# Altium PCB ICwT.PcbDoc (part 3 of 4)
Units mm, origin at the board's own origin, x right, y up, seen from the top; angles counter-clockwise.
Board outline 132 x 99.5 mm, 2 copper layers (Top Layer, Bottom Layer); 241 components, 265 nets, 1108 pads, 443 vias.
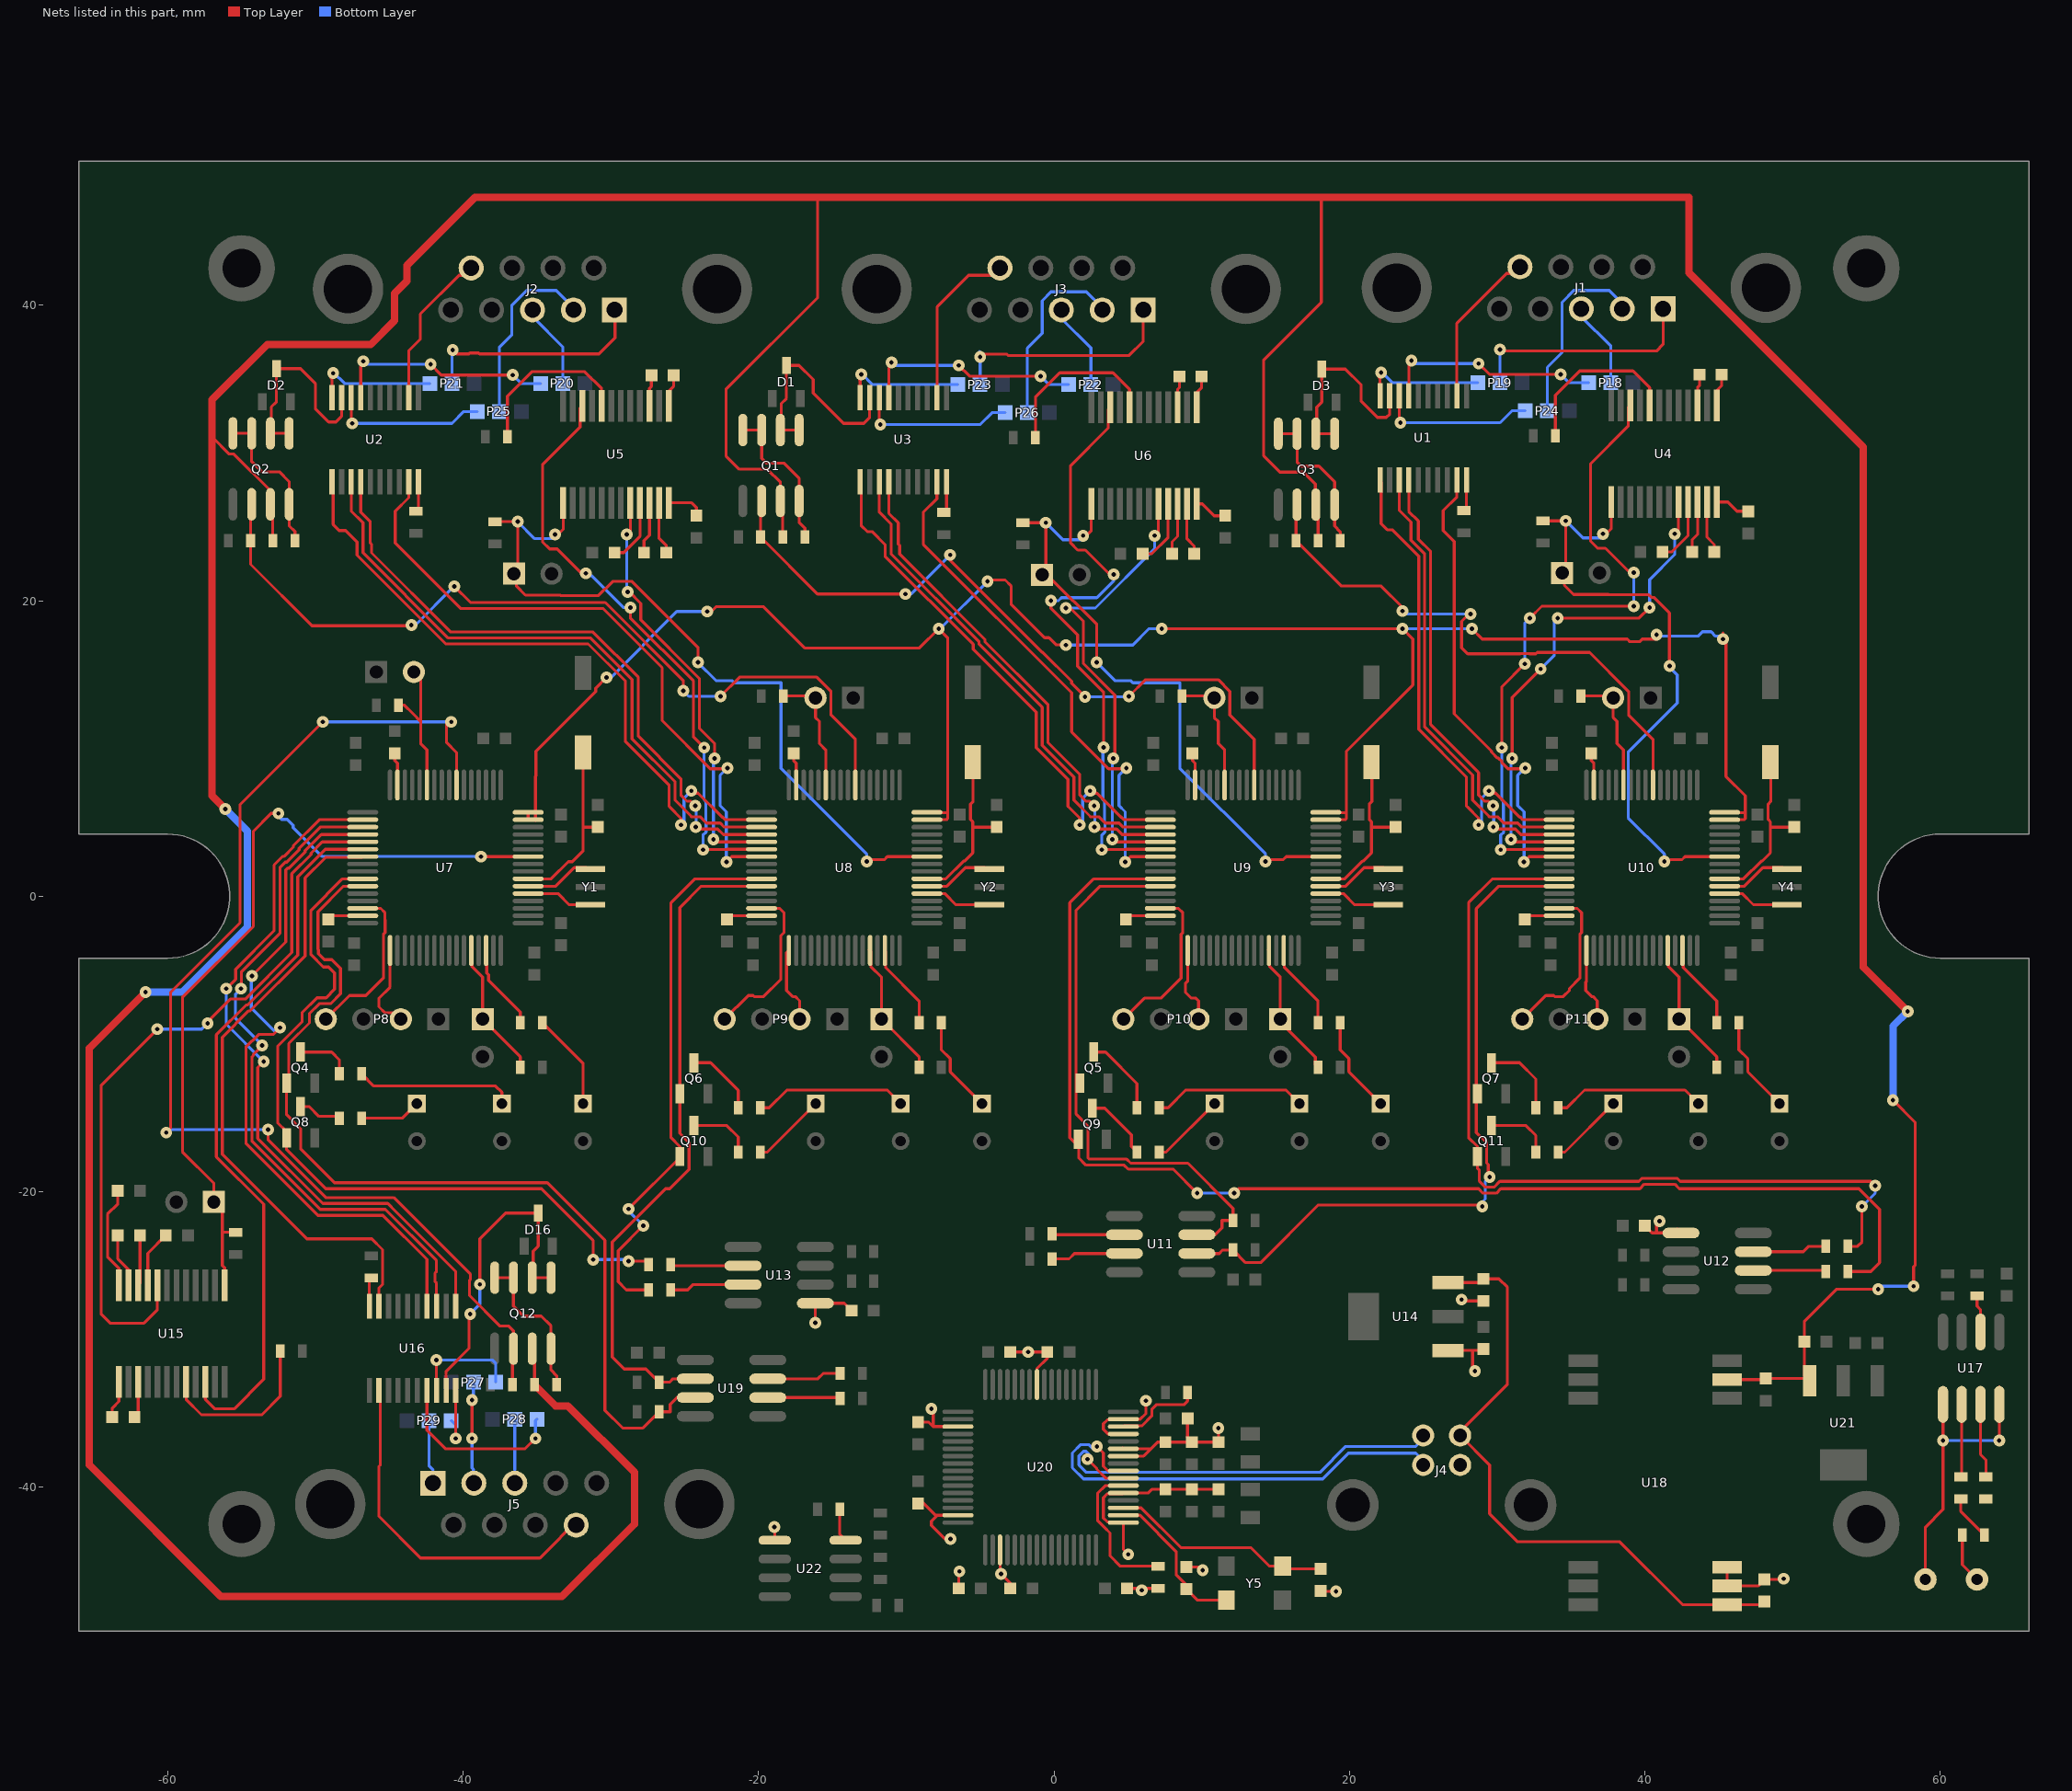
[diagram p3: the nets of this part, all layers, seen from the top]

## Via types
v1: diameter 0.8, hole 0.3, Top Layer to Bottom Layer, 433 vias
v2: diameter 1, hole 0.5, Top Layer to Bottom Layer, 10 vias

## Nets (pads, with @x,y where several pads share a name; then routed paths per layer and width w, separated by ;. In a path a pad name is that pad's centre, name@x,y a point inside that pad or via, vN(x,y) a via of type N, cw(c..) or ccw(c..) an arc to the next point about the centre after c; other vN are vias at no path point) (continued)
MISO_EX_External_iface1: P27.3 U16.18 | length 7.4
  Top Layer w0.2: U16.18@-41.8,-33.45 v1(-41.8,-31.4)
  Bottom Layer w0.2: v1(-41.8,-31.4) -38,-31.4 -37.8,-31.6 P27.3@-37.8,-32.9
MISO_EX_External_iface2: P25.3 U2.18 | length 10.6
  Top Layer w0.2: U2.18@-47.575,33.75 -47.575,32.075 v1(-47.5,32)
  Bottom Layer w0.2: v1(-47.5,32) -40.75,32 -39.95,32.8 P25.3@-39.05,32.8
MISO_EX_External_iface3: P26.3 U3.18 | length 10.6
  Top Layer w0.2: U3.18@-11.825,33.675 -11.825,32 v1(-11.75,31.925)
  Bottom Layer w0.2: v1(-11.75,31.925) -5,31.925 -4.2,32.725 P26.3@-3.3,32.725
MISO_EX_External_iface4: P24.3 U1.18 | length 10.6
  Top Layer w0.2: U1.18@23.379,33.8 23.379,32.125 v1(23.454,32.05)
  Bottom Layer w0.2: v1(23.454,32.05) 30.204,32.05 31.004,32.85 P24.3@31.904,32.85
MISO_External_iface1: U7.35 U16.3 | length 46.7
  Top Layer w0.2: v1(-55.038,-6.262) -55,-6.224 -55,-5.11 -52.4,-2.51 -52.4,1.939 -52.039,2.3 -51.944,2.3 -51.096,3.148 -51.096,3.242 -49.664,4.675 -49.125,4.675 U7.35@-46.795,4.675 ; v1@-53.6,-10.086 -53.6,-10.194 -53.706,-10.3 -53.79,-10.3 -54.2,-10.71 -54.2,-10.794 -54.3,-10.894 -54.3,-16.566 -49.666,-21.2 -45.266,-21.2 -41.8,-24.666 -41.8,-25.41 -41.9,-25.51 -41.9,-26.09 -41.8,-26.19 U16.3@-41.8,-27.75
  Bottom Layer w0.2: v1(-55.038,-6.262) -55.407,-6.631 -55.407,-8.278 -53.6,-10.086 v1(-53.6,-10.1)
MISO_External_iface2: U2.3 U8.35 | length 42.9
  Top Layer w0.2: U2.3@-47.575,28.05 -47.575,26.069 -46.778,25.272 -46.778,23.25 -41.003,17.475 -31.369,17.475 -28.556,14.662 -28.556,10.65 -25.651,7.745 -25.651,6.511 -24.541,5.401 -24.541,5.375 -23.961,5.375 -23.536,4.95 -22.594,4.95 -22.319,4.675 U8.35@-19.795,4.675
MISO_External_iface3: U3.3 U9.35 | length 33.6
  Top Layer w0.2: U3.3@-11.825,27.975 -11.825,25.994 -11.028,25.197 -11.028,23.175 -5.069,17.216 -5.069,17.051 -0.8,12.782 -0.8,10.216 1.349,8.067 1.349,6.511 2.459,5.401 2.459,5.375 3.039,5.375 3.464,4.95 4.406,4.95 4.681,4.675 U9.35@7.205,4.675
MISO_External_iface4: U1.3 U10.35 | length 30.3
  Top Layer w0.2: U1.3@23.379,28.1 23.379,26.119 24.176,25.322 24.176,24.091 25.1,23.167 25.1,11.456 28.325,8.231 28.325,8.207 28.349,8.183 28.349,6.511 29.459,5.401 29.459,5.375 30.039,5.375 30.464,4.95 31.406,4.95 31.681,4.675 U10.35@34.205,4.675
MOSI_EX_External_iface1: P28.3 U16.17 | length 12.2
  Top Layer w0.2: U16.17@-42.45,-33.45 -42.45,-36.15 -41.2,-37.4 -35.8,-37.4 v1(-35.1,-36.7)
  Bottom Layer w0.2: v1(-35.1,-36.7) -35.1,-35.5 P28.3@-35,-35.4
MOSI_EX_External_iface2: P20.3 U2.17 | length 15.1
  Top Layer w0.2: U2.17@-46.925,33.75 -46.925,35.825 -46.75,36 v1(-46.75,36.2) ; v1(-42.2,36) -41.475,35.275 v1(-36.65,35.275)
  Bottom Layer w0.2: v1@-46.75,36 v1(-42.2,36) ; v1(-36.65,35.275) -36.075,34.7 P20.3@-34.75,34.7
MOSI_EX_External_iface3: P22.3 U3.17 | length 15.1
  Top Layer w0.2: U3.17@-11.175,33.675 -11.175,35.75 -11,35.925 v1(-11,36.125) ; v1(-6.45,35.925) -5.725,35.2 v1(-0.9,35.2)
  Bottom Layer w0.2: v1@-11,35.925 v1(-6.45,35.925) ; v1(-0.9,35.2) -0.325,34.625 P22.3@1,34.625
MOSI_EX_External_iface4: P18.3 U1.17 | length 15.1
  Top Layer w0.2: U1.17@24.029,33.8 24.029,35.875 24.204,36.05 v1(24.204,36.25) ; v1(28.754,36.05) 29.479,35.325 v1(34.304,35.325)
  Bottom Layer w0.2: v1@24.204,36.05 v1(28.754,36.05) ; v1(34.304,35.325) 34.879,34.75 P18.3@36.204,34.75
MOSI_External_iface1: U7.36 U16.4 | length 46.9
  Top Layer w0.2: v1(-54.3,-5.4) -52,-3.1 -52,1.773 -51.873,1.9 -51.779,1.9 -50.696,2.983 -50.696,3.077 -49.598,4.175 U7.36@-46.795,4.175 ; v1(-52.4,-8.9) -52.862,-9.362 -53.852,-9.362 -54.7,-10.21 -54.7,-16.731 -49.831,-21.6 -45.431,-21.6 -42.45,-24.581 U16.4@-42.45,-27.75
  Bottom Layer w0.2: v1@-54.338,-5.705 -54.338,-7.572 -52.81,-9.1 -52.6,-9.1 v1(-52.4,-8.9)
MOSI_External_iface2: U2.4 U8.36 | length 43.3
  Top Layer w0.2: U2.4@-46.925,28.05 -46.925,25.984 -46.283,25.342 -46.283,23.9 -46.2,23.817 -46.2,23.237 -40.838,17.875 -31.203,17.875 -28.134,14.805 -28.134,10.825 -25.251,7.942 -25.251,6.835 -24.841,6.425 -24.575,6.425 v1(-24.275,6.125) ; v1(-24.251,4.675) -24.225,4.649 -24.225,4.55 -22.76,4.55 -22.385,4.175 U8.36@-19.795,4.175
  Bottom Layer w0.2: v1(-24.275,6.125) -24.226,6.076 -24.226,4.7 v1(-24.251,4.675)
MOSI_External_iface3: U3.4 U9.36 | length 34
  Top Layer w0.2: U3.4@-11.175,27.975 -11.175,25.909 -10.533,25.267 -10.533,23.825 -10.45,23.742 -10.45,23.162 -4.669,17.381 -4.669,17.216 -0.4,12.947 -0.4,10.381 1.749,8.233 1.749,6.835 2.159,6.425 2.425,6.425 v1(2.725,6.125) ; v1(2.749,4.675) 2.775,4.649 2.775,4.55 4.24,4.55 4.615,4.175 U9.36@7.205,4.175
  Bottom Layer w0.2: v1(2.725,6.125) 2.774,6.076 2.774,4.7 v1(2.749,4.675)
MOSI_External_iface4: U1.4 U10.36 | length 30.7
  Top Layer w0.2: U1.4@24.029,28.1 24.029,26.034 24.671,25.392 24.671,24.161 25.5,23.332 25.5,11.622 28.725,8.397 28.725,8.372 28.749,8.349 28.749,6.835 29.159,6.425 29.425,6.425 v1(29.725,6.125) ; v1(29.749,4.675) 29.775,4.649 29.775,4.55 31.24,4.55 31.615,4.175 U10.36@34.205,4.175
  Bottom Layer w0.2: v1(29.725,6.125) 29.774,6.076 29.774,4.7 v1(29.749,4.675)
NetC2_1: C75.1 U20.3 Y5.4 | length 15.1
  Top Layer w0.2: U20.3@4.7,-41.4 5.9,-41.4 8.6,-44.1 13.35,-44.1 14.6,-45.35 Y5.4@15.475,-45.35 15.65,-45.525 C75.1@18.05,-45.525
NetC4_1: C74.1 U20.2 Y5.2 | length 10.4
  Top Layer w0.2: U20.2@4.7,-41.9 5.825,-41.9 8.275,-44.35 8.275,-45.924 8.975,-46.624 C74.1@8.975,-46.9 9.725,-47.65 Y5.2@11.675,-47.65
NetC16_1: C64.1 U15.1 | length 2.6
  Top Layer w0.2: C64.1@-63.75,-35.25 -63.75,-34.65 -63.3,-34.2 U15.1@-63.3,-32.875
NetC16_2: C64.2 U15.3 | length 2.5
  Top Layer w0.2: C64.2@-62.25,-35.25 -62,-35 U15.3@-62,-32.875
NetC28_1: C51.1 U15.23 | length 3.7
  Top Layer w0.2: C51.1@-63.375,-22.95 -63.375,-24.551 -62.65,-25.276 U15.23@-62.65,-26.325
NetC28_2: C51.2 U15.22 | length 3.4
  Top Layer w0.2: U15.22@-62,-26.325 -61.875,-26.2 C51.2@-61.875,-22.95
NetC29_1: C52.1 U15.21 | length 3.9
  Top Layer w0.2: U15.21@-61.35,-26.325 -61.35,-24.175 C52.1@-60.125,-22.95
NetC31_1: C49.1 U15.24 | length 7
  Top Layer w0.2: C49.1@-63.375,-19.95 -63.375,-20.825 -64.075,-21.525 -64.075,-24.416 -63.3,-25.191 U15.24@-63.3,-26.325
NetC44_2: C33.2 U7.47 | length 2.5
  Top Layer w0.2: C33.2@-49.125,-1.575 -48.875,-1.325 U7.47@-46.795,-1.325 U7.47@-46.845,-1.275
NetC45_2: C34.2 U8.47 | length 2.5
  Top Layer w0.2: C34.2@-22.125,-1.575 -21.875,-1.325 U8.47@-19.795,-1.325 U8.47@-19.845,-1.275
NetC46_2: C35.2 U9.47 | length 2.5
  Top Layer w0.2: C35.2@4.875,-1.575 5.125,-1.325 U9.47@7.205,-1.325 U9.47@7.155,-1.275
NetC47_2: C36.2 U10.47 | length 2.8
  Top Layer w0.2: U10.47@34.205,-1.325 C36.2@32.125,-1.325 ; C36.2@32.125,-1.325 C36.2@31.875,-1.575 C36.2@32.125,-1.325
NetC60_2: C13.2 U7.31 | length 2.2
  Top Layer w0.2: C13.2@-44.625,9.675 -44.625,9.175 -44.445,8.995 U7.31@-44.445,7.525
NetC61_2: C14.2 U8.31 | length 2.2
  Top Layer w0.2: C14.2@-17.625,9.675 -17.625,9.175 -17.445,8.995 U8.31@-17.445,7.525
NetC62_2: C15.2 U9.31 | length 2.2
  Top Layer w0.2: C15.2@9.375,9.675 9.375,9.175 9.555,8.995 U9.31@9.555,7.525
NetC63_2: C16.2 U10.31 | length 2.2
  Top Layer w0.2: C16.2@36.375,9.675 36.375,9.175 36.555,8.995 U10.31@36.555,7.525
NetC68_1: C11.1 U6.23 | length 3.6
  Top Layer w0.2: U6.23@9.025,26.55 9,26.525 9,24.175 9.5,23.675 C11.1@9.5,23.175
NetC68_2: C11.2 U6.22 | length 3.5
  Top Layer w0.2: C11.2@8,23.175 8,23.984 8.375,24.359 U6.22@8.375,26.55
NetC69_1: C12.1 U6.21 | length 4.5
  Top Layer w0.2: C12.1@6,23.175 6.625,23.175 7.725,24.275 U6.21@7.725,26.55
NetC70_1: C9.1 U5.23 | length 3.6
  Top Layer w0.2: U5.23@-26.725,26.625 -26.75,26.6 -26.75,24.25 -26.25,23.75 C9.1@-26.25,23.25
NetC70_2: C9.2 U5.22 | length 3.5
  Top Layer w0.2: C9.2@-27.75,23.25 -27.75,24.059 -27.375,24.434 U5.22@-27.375,26.625
NetC71_1: C10.1 U5.21 | length 4.5
  Top Layer w0.2: C10.1@-29.75,23.25 -29.125,23.25 -28.025,24.35 U5.21@-28.025,26.625
NetC72_1: C7.1 U4.23 | length 3.6
  Top Layer w0.2: U4.23@44.229,26.675 44.204,26.65 44.204,24.3 44.704,23.8 C7.1@44.704,23.3
NetC72_2: C7.2 U4.22 | length 3.5
  Top Layer w0.2: C7.2@43.204,23.3 43.204,24.109 43.579,24.484 U4.22@43.579,26.675
NetC73_1: C8.1 U4.21 | length 4.5
  Top Layer w0.2: C8.1@41.204,23.3 41.829,23.3 42.929,24.4 U4.21@42.929,26.675
NetC74_1: C6.1 U6.24 | length 2.2
  Top Layer w0.2: U6.24@9.675,26.55 10.05,26.55 10.85,25.75 C6.1@11.5,25.75
NetC75_1: C5.1 U5.24 | length 2.6
  Top Layer w0.2: U5.24@-26.075,26.625 -24.525,26.625 -24.2,26.3 C5.1@-24.2,25.75
NetC76_1: C4.1 U4.24 | length 2.4
  Top Layer w0.2: U4.24@44.879,26.675 45.625,26.675 46.25,26.05 C4.1@47,26.05
NetC77_1: C3.1 U6.1 | length 2.2
  Top Layer w0.2: U6.1@9.7,33.074 U6.1@9.675,33.1 9.675,34.1 10,34.425 C3.1@10,35.175
NetC77_2: C3.2 U6.3 | length 2.1
  Top Layer w0.2: U6.3@8.375,33.1 8.375,34.3 8.5,34.425 C3.2@8.5,35.175
NetC78_1: C2.1 U5.1 | length 2.2
  Top Layer w0.2: U5.1@-26.05,33.149 -26.075,33.174 -26.075,34.175 -25.75,34.5 C2.1@-25.75,35.25
NetC78_2: C2.2 U5.3 | length 2.1
  Top Layer w0.2: U5.3@-27.375,33.175 -27.375,34.375 -27.25,34.5 C2.2@-27.25,35.25
NetC79_1: C1.1 U4.1 | length 2.2
  Top Layer w0.2: U4.1@44.879,33.225 U4.1@44.904,33.199 ; U4.1@44.879,33.225 44.879,34.225 45.204,34.55 C1.1@45.204,35.3
NetC79_2: C1.2 U4.3 | length 2.1
  Top Layer w0.2: U4.3@43.579,33.225 43.579,34.425 43.704,34.55 C1.2@43.704,35.3
NetD1_3: D16.3 Q12.5 Q12.6 U16.19 | length 21.7
  Top Layer w0.2: U16.19@-41.15,-33.45 -41.15,-32.15 -39.6,-30.6 -39.6,-28.35 v1(-39.525,-28.275) ; v1(-38.864,-26.275) -38.864,-23.189 -37.125,-21.45 D16.3@-34.91,-21.45 -34.91,-23.685 -35.26,-24.035 -35.26,-25.765 Q12.6@-35.32,-25.825 Q12.5@-34.05,-25.825
  Bottom Layer w0.2: v1(-39.525,-28.275) -38.864,-27.614 v1(-38.864,-26.275)
NetD2_1: D4.1 R32.1 | length 4.2
  Top Layer w0.2: R32.1@-46.875,-15.025 -44.115,-15.025 D4.1@-43.125,-14.035
NetD3_1: D5.1 R28.1 | length 10.8
  Top Layer w0.2: R28.1@-46.875,-12.025 -46.05,-12.85 -37.8,-12.85 -37.375,-13.275 D5.1@-37.375,-14.035
NetD4_1: D6.1 R20.2 | length 6.6
  Top Layer w0.2: R20.2@-34.625,-8.575 -31.875,-11.325 D6.1@-31.875,-14.035
NetD5_1: D10.1 R33.1 | length 5.1
  Top Layer w0.2: R33.1@-19.875,-17.325 -19.415,-17.325 D10.1@-16.125,-14.035
NetD6_1: D7.1 R29.1 | length 10.4
  Top Layer w0.2: R29.1@-19.875,-14.325 -19.275,-14.325 -18.075,-13.125 -11.285,-13.125 D7.1@-10.375,-14.035
NetD7_1: D8.1 R21.2 | length 6.6
  Top Layer w0.2: R21.2@-7.625,-8.575 -7.625,-10.401 -7.025,-11.001 -7.025,-11.885 D8.1@-4.875,-14.035
NetD8_1: D11.1 R34.1 | length 5.1
  Top Layer w0.2: R34.1@7.125,-17.325 7.585,-17.325 D11.1@10.875,-14.035
NetD9_1: D9.1 R30.1 | length 10.4
  Top Layer w0.2: R30.1@7.125,-14.325 7.725,-14.325 8.925,-13.125 15.715,-13.125 D9.1@16.625,-14.035
NetD10_1: D12.1 R22.2 | length 6.6
  Top Layer w0.2: R22.2@19.375,-8.575 19.375,-10.401 19.975,-11.001 19.975,-11.885 D12.1@22.125,-14.035
NetD11_1: D15.1 R35.1 | length 5.1
  Top Layer w0.2: R35.1@34.125,-17.325 34.585,-17.325 D15.1@37.875,-14.035
NetD12_1: D13.1 R31.1 | length 10.4
  Top Layer w0.2: R31.1@34.125,-14.325 34.725,-14.325 35.925,-13.125 42.715,-13.125 D13.1@43.625,-14.035
NetD13_1: D14.1 R23.2 | length 6.6
  Top Layer w0.2: R23.2@46.375,-8.575 46.375,-10.401 46.975,-11.001 46.975,-11.885 D14.1@49.125,-14.035
NetD14_3: D3.3 Q3.5 Q3.6 U1.19 | length 13.7
  Top Layer w0.2: Q3.5@19,31.3 Q3.6@17.73,31.3 17.79,31.36 17.79,33.09 18.14,33.44 D3.3@18.14,35.675 19.725,35.675 20.8,34.6 20.8,33.5 21.9,32.4 22.5,32.4 22.729,32.629 U1.19@22.729,33.875
NetD15_3: D2.3 Q2.5 Q2.6 U2.19 | length 14.1
  Top Layer w0.2: Q2.5@-51.775,31.325 Q2.6@-53.045,31.325 -52.985,31.385 -52.985,33.115 -52.635,33.465 D2.3@-52.635,35.7 -51,35.7 -50,34.7 -50,33 -49.1,32.1 -48.6,32.1 -48.225,32.475 U2.19@-48.225,33.75
NetD16_3: D1.3 Q1.5 Q1.6 U3.19 | length 15.1
  Top Layer w0.2: Q1.5@-17.25,31.55 Q1.6@-18.52,31.55 -18.46,31.61 -18.46,33.34 -18.11,33.69 D1.3@-18.11,35.925 -17.25,35.925 -16.3,34.975 -16.3,34.05 -14.25,32 -12.875,32 -12.475,32.4 U3.19@-12.475,33.75
NetJ1_1: J5.1 P29.2 | length 3.4
  Bottom Layer w0.2: P29.2@-42.3,-35.5 -42.3,-38.57 -42.04,-38.83
NetJ1_2: J5.2 P27.2 | length 6.4
  Top Layer w0.2: v1(-39.4,-36.7) v1(-39.4,-34.1)
  Bottom Layer w0.2: v1(-39.4,-36.7) -39.4,-38.7 -39.3,-38.8 J5.2@-39.3,-39.2 ; v1(-39.4,-34.1) -39.3,-34 P27.2@-39.3,-32.9
NetJ1_3: J5.3 P28.2 | length 3.4
  Bottom Layer w0.2: -36.5,-38.83 P28.2@-36.5,-35.4
NetJ3_1: J2.1 P21.2 | length 15.3
  Top Layer w0.2: v1(-40.7,36.958) -40.442,36.7 -39.61,36.7 -39.54,36.77 -38.96,36.77 -38.89,36.7 -30.8,36.7 -29.71,37.79 J2.1@-29.71,39.18
  Bottom Layer w0.2: P21.2@-40.75,34.7 -40.75,36.908 v1(-40.7,36.958)
NetJ3_2: J2.2 P25.2 | length 13.3
  Bottom Layer w0.2: P25.2@-37.55,32.8 -37.55,37.15 -36.7,38 -36.7,40 -35.7,41 -33.7,41 -32.48,39.78 J2.2@-32.48,39.18
NetJ3_3: J2.3 P20.2 | length 5.3
  Bottom Layer w0.2: J2.3@-35.25,39.18 -33.25,37.18 P20.2@-33.25,34.7
NetJ4_1: J3.1 P23.2 | length 15.5
  Top Layer w0.2: v1(-5,36.5) -4.805,36.695 -3.21,36.695 -3.115,36.6 5.1,36.6 6.04,37.54 J3.1@6.04,39.18
  Bottom Layer w0.2: v1@-5.04,36.873 -5,36.833 v1(-5,36.5) P23.2@-5,34.625
NetJ4_2: J3.2 P26.2 | length 13.4
  Bottom Layer w0.2: P26.2@-1.8,32.725 -1.8,37.1 -0.8,38.1 -0.8,40.3 -0.2,40.9 2.2,40.9 3.27,39.83 J3.2@3.27,39.18
NetJ4_3: J3.3 P22.2 | length 5.3
  Bottom Layer w0.2: J3.3@0.5,39.105 2.5,37.105 P22.2@2.5,34.625
NetJ5_1: J1.1 P19.2 | length 15.5
  Top Layer w0.2: v1(30.204,36.996) 30.3,36.9 40.8,36.9 41.244,37.344 J1.1@41.244,39.305
  Bottom Layer w0.2: P19.2@30.204,34.75 v1(30.204,36.996)
NetJ5_2: J1.2 P24.2 | length 13.4
  Bottom Layer w0.2: P24.2@33.404,32.85 33.404,35.79 34.4,36.786 34.4,40.2 35.2,41 37.6,41 38.474,40.126 J1.2@38.474,39.305
NetJ5_3: J1.3 P18.2 | length 5.3
  Bottom Layer w0.2: J1.3@35.704,39.23 37.704,37.23 P18.2@37.704,34.75
NetP1_1: P17.1 U17.1 U17.4 | length 19.8
  Top Layer w0.2: P17.1@59,-46.25 59,-42.7 60.195,-41.505 v1(60.195,-36.85) 60.195,-34.405 U17.1@60.19,-34.4 ; v1(63.995,-36.85) 64,-36.845 U17.4@64,-33.196
  Bottom Layer w0.2: v1(60.195,-36.85) v1(63.995,-36.85)
NetP1_2: P17.2 R64.1 | length 3.4
  Top Layer w0.2: R64.1@61.5,-43.25 61.5,-45.25 P17.2@62.5,-46.25
NetP3_1: P12.1 R24.2 U7.60 | length 9.3
  Top Layer w0.2: U7.60@-39.445,-3.675 -39.395,-3.725 -39.395,-4.761 -38.675,-5.481 P12.1@-38.675,-8.325 -36.125,-10.875 R24.2@-36.125,-11.575
NetP4_1: P13.1 R25.2 U8.60 | length 9.3
  Top Layer w0.2: U8.60@-12.495,-3.625 U8.60@-12.445,-3.675 -12.395,-3.725 -12.395,-4.761 -11.675,-5.481 P13.1@-11.675,-8.325 -9.125,-10.875 R25.2@-9.125,-11.575
NetP5_1: P14.1 R26.2 U9.60 | length 9.3
  Top Layer w0.2: U9.60@14.505,-3.625 U9.60@14.555,-3.675 14.605,-3.725 14.605,-4.761 15.325,-5.481 P14.1@15.325,-8.325 15.325,-8.525 17.7,-10.9 17.7,-11.4 R26.2@17.875,-11.575
NetP6_1: P15.1 R27.2 U10.60 | length 9.3
  Top Layer w0.2: U10.60@41.505,-3.625 U10.60@41.555,-3.675 41.605,-3.725 41.605,-4.761 42.325,-5.481 P15.1@42.325,-8.325 44.875,-10.875 R27.2@44.875,-11.575
NetP11_2: P5.2 R16.2 U8.27 | length 8.4
  Top Layer w0.2: R16.2@-18.325,13.55 -16.265,13.55 P5.2@-16.14,13.425 -16.14,12.09 -15.875,11.825 -15.875,10.325 -15.445,9.895 U8.27@-15.445,7.525
NetP12_2: P6.2 R17.2 U9.27 | length 8.4
  Top Layer w0.2: R17.2@8.675,13.55 10.735,13.55 P6.2@10.86,13.425 10.86,12.09 11.125,11.825 11.125,10.325 11.555,9.895 U9.27@11.555,7.525
NetP13_2: P7.2 R18.2 U10.27 | length 8.4
  Top Layer w0.2: R18.2@35.675,13.55 37.735,13.55 P7.2@37.86,13.425 37.86,12.09 38.125,11.825 38.125,10.325 38.555,9.895 U10.27@38.555,7.525
NetP14_2: P4.2 R19.2 U7.27 | length 10
  Top Layer w0.2: R19.2@-44.375,12.925 -43.975,12.925 -43.425,12.375 -42.875,11.825 ; P4.2@-43.335,15.175 -42.875,14.715 -42.875,11.825 ; U7.27@-42.445,7.525 -42.445,9.895 -42.875,10.325 -42.875,11.825
NetQ1_2: Q12.2 R56.2 U7.23 | length 80
  Top Layer w0.2: v1(-60.1,-16) -59.8,-15.7 -59.8,-6.5 -55.1,-1.8 -55.1,6.2 v1(-49.5,11.8) ; v1(-53.2,-15.8) -53.2,-16.5 -49.3,-20.4 -44.7,-20.4 -39.5,-25.6 -39.5,-25.921 -39.564,-25.985 -39.564,-27.036 -37.5,-29.1 -36.9,-29.1 -36.59,-29.41 Q12.2@-36.59,-30.625 -36.66,-30.695 R56.2@-36.66,-33.075 ; v1(-40.802,11.798) -41.121,11.798 -41.121,10.402 -40.445,9.726 U7.23@-40.445,7.525
  Bottom Layer w0.2: v1(-60.1,-16) -59.9,-15.8 v1(-53.2,-15.8) ; v1(-49.5,11.8) -49.498,11.798 v1(-40.802,11.798)
NetQ1_4: Q12.4 Q12.7 Q12.8 R55.1 | length 10.4
  Top Layer w0.2: Q12.8@-37.86,-25.825 Q12.7@-36.59,-25.825 -36.59,-27.745 -35.91,-28.425 -34.71,-28.425 -34.05,-29.085 Q12.4@-34.05,-30.625 -34.05,-32.075 -33.66,-32.465 R55.1@-33.66,-33.075
NetQ5_STM321_3: Q4.3 R28.2 | length 3.8
  Top Layer w0.2: Q4.3@-51,-10.55 -48.9,-10.55 -48.375,-11.075 R28.2@-48.375,-12.025
NetQ5_STM322_3: Q6.3 R29.2 | length 5
  Top Layer w0.2: Q6.3@-24.375,-11.275 -23.25,-11.275 -21.375,-13.15 R29.2@-21.375,-14.325
NetQ5_STM323_3: Q5.3 R30.2 | length 5.4
  Top Layer w0.2: Q5.3@2.7,-10.55 3.49,-10.55 5.625,-12.685 R30.2@5.625,-14.325
NetQ5_STM324_3: Q7.3 R31.2 | length 5.4
  Top Layer w0.2: Q7.3@29.625,-11.275 31.525,-11.275 32.625,-12.375 R31.2@32.625,-14.325
NetQ9_STM321_3: Q8.3 R32.2 | length 2.9
  Top Layer w0.2: Q8.3@-51,-14.25 -50.4,-14.25 -49.75,-14.9 -48.5,-14.9 R32.2@-48.375,-15.025
NetQ9_STM322_3: Q10.3 R33.2 | length 4.3
  Top Layer w0.2: Q10.3@-24.375,-15.525 -22.15,-15.525 -21.375,-16.3 R33.2@-21.375,-17.325
NetQ9_STM323_3: Q9.3 R34.2 | length 4.7
  Top Layer w0.2: Q9.3@2.6,-14.35 3.44,-14.35 5.25,-16.16 5.25,-16.95 R34.2@5.625,-17.325
NetQ9_STM324_3: Q11.3 R35.2 | length 4.4
  Top Layer w0.2: Q11.3@29.625,-15.525 31.95,-15.525 32.625,-16.2 R35.2@32.625,-17.325
NetQ10_2: Q3.2 R15.2 U10.23 | length 38.9
  Top Layer w0.2: Q3.2@16.46,26.5 16.39,26.43 R15.2@16.39,24.05 19.44,21 22.131,21 23.6,19.531 v1(23.6,19.3) ; v1(28.2,19.1) 28.2,19.2 27.6,18.6 27.6,16.81 28.01,16.4 31.56,16.4 31.585,16.425 32.165,16.425 32.19,16.4 32.625,16.4 32.725,16.5 36.27,16.5 38.91,13.86 38.91,12.27 40.555,10.625 U10.23@40.555,7.525
  Bottom Layer w0.2: v1(23.6,19.3) 23.8,19.1 v1(28.2,19.1)
NetQ10_4: Q3.4 Q3.7 Q3.8 R14.1 | length 10.4
  Top Layer w0.2: Q3.8@15.19,31.3 Q3.7@16.46,31.3 16.46,29.38 16.74,29.1 17.94,29.1 19,28.04 Q3.4@19,26.5 19,25.05 19.39,24.66 R14.1@19.39,24.05
NetQ11_2: Q2.2 R13.2 U8.23 | length 57.7
  Top Layer w0.2: Q2.2@-54.315,26.525 -54.385,26.455 R13.2@-54.385,24.075 -54.385,22.46 -50.225,18.3 -43.55,18.3 v1(-43.5,18.35) ; v1(-40.6,20.975) -39.5,19.875 -30.375,19.875 -25.1,14.6 v1(-25.1,13.9) ; v1(-22.575,13.525) -21.275,14.825 -16.055,14.825 -15.09,13.86 -15.09,12.27 -13.445,10.625 U8.23@-13.445,7.525
  Bottom Layer w0.2: v1(-43.5,18.35) -43.225,18.35 v1(-40.6,20.975) ; v1(-25.1,13.9) -24.725,13.525 v1(-22.575,13.525)
NetQ11_4: Q2.4 Q2.7 Q2.8 R12.1 | length 10.4
  Top Layer w0.2: Q2.8@-55.585,31.325 Q2.7@-54.315,31.325 -54.315,29.405 -53.635,28.725 -52.435,28.725 -51.775,28.065 Q2.4@-51.775,26.525 -51.775,25.075 -51.385,24.685 R12.1@-51.385,24.075
NetQ12_2: Q1.2 R11.2 U9.23 | length 49
  Top Layer w0.2: Q1.2@-19.79,26.75 -19.86,26.68 R11.2@-19.86,24.3 -16.01,20.45 v1(-10.05,20.45) ; v1(-7.025,23.1) -7.025,22.735 -0.795,16.505 -0.755,16.505 1.2,14.55 1.2,14.4 v1(2.1,13.5) ; v1(5.075,13.525) 6.2,14.65 11.12,14.65 11.91,13.86 11.91,12.27 13.555,10.625 U9.23@13.555,7.525
  Bottom Layer w0.2: v1(-10.05,20.45) -9.675,20.45 v1(-7.025,23.1) ; v1(2.1,13.5) 5.05,13.5 v1(5.075,13.525)
NetQ12_4: Q1.4 Q1.7 Q1.8 R10.1 | length 10.4
  Top Layer w0.2: Q1.8@-21.06,31.55 Q1.7@-19.79,31.55 -19.79,29.63 -19.46,29.3 -18.26,29.3 -17.25,28.29 Q1.4@-17.25,26.75 -17.25,25.3 -16.86,24.91 R10.1@-16.86,24.3
NetR2_2: R66.2 U20.6 | length 10.1
  Top Layer w0.2: U20.6@4.7,-39.9 3.475,-39.9 2.95,-40.425 2.95,-42.252 3.448,-42.75 3.45,-42.75 3.8,-43.1 3.8,-44.65 4.5,-45.35 R66.2@7.05,-45.35
NetR4_2: R60.1 R64.2 | length 3.1
  Top Layer w0.2: R60.1@61.395,-40.8 61.395,-41.645 R64.2@63,-43.25
NetR6_1: R62.1 U22.4 | length 2.3
  Top Layer w0.2: R62.1@-14.5,-41.5 -14.5,-43.195 U22.4@-14.1,-43.595
NetR7_1: R61.1
NetR7_2: R61.2 U17.3 | length 5.1
  Top Layer w0.2: U17.3@62.73,-34.4 62.73,-37.785 63.095,-38.15 R61.2@63.095,-39.3
NetR8_2: R60.2 U17.2 | length 4.9
  Top Layer w0.2: R60.2@61.395,-39.3 61.46,-39.235 U17.2@61.46,-34.4
NetR10_2: R58.2 U19.2 | length 4.9
  Top Layer w0.2: U19.2@-19.375,-33.935 -14.54,-33.935 R58.2@-14.475,-34
NetR11_1: R57.1 U20.14 | length 5.9
  Top Layer w0.2: U20.14@4.7,-35.9 4.75,-35.85 5.966,-35.85 6.625,-35.191 6.625,-34.74 6.925,-34.44 6.925,-34.425 8.8,-34.425 9.05,-34.175 R57.1@9.05,-33.6
NetR15_2: R53.2 U19.3 | length 5.1
  Top Layer w0.2: U19.3@-19.375,-32.665 -15.99,-32.665 -15.625,-32.3 R53.2@-14.475,-32.3
NetR16_2: R52.2 U15.8 | length 11.6
  Top Layer w0.2: U15.8@-58.75,-32.875 -58.75,-34.068 -57.718,-35.1 -53.625,-35.1 -52.375,-33.85 R52.2@-52.375,-30.8
NetR17_1: R48.1 U17.6 | length 2.5
  Top Layer w0.2: R48.1@62.495,-27.05 62.495,-27.75 62.73,-27.985 U17.6@62.73,-29.5
NetR19_2: R51.2 U13.3 | length 5.1
  Top Layer w0.2: R51.2@-25.95,-26.65 -24.8,-26.65 -24.435,-26.285 U13.3@-21.05,-26.285
NetR22_1: R43.1 U16.10 | length 2
  Top Layer w0.2: U16.10@-46.35,-27.75 -46.35,-26 R43.1@-46.2,-25.85
NetR23_2: R46.2 U12.2 | length 4.9
  Top Layer w0.2: U12.2@47.35,-25.335 52.185,-25.335 R46.2@52.25,-25.4
NetR24_2: R45.2 U13.2 | length 4.9
  Top Layer w0.2: R45.2@-25.95,-24.95 -25.885,-25.015 U13.2@-21.05,-25.015
NetR25_2: R44.2 U11.3 | length 5.1
  Top Layer w0.2: R44.2@-0.125,-24.55 1.025,-24.55 1.39,-24.185 U11.3@4.775,-24.185
NetR30_2: R39.2 U12.3 | length 5.1
  Top Layer w0.2: U12.3@47.35,-24.065 50.735,-24.065 51.1,-23.7 R39.2@52.25,-23.7
NetR31_2: R37.2 U11.2 | length 4.9
  Top Layer w0.2: R37.2@-0.125,-22.85 -0.06,-22.915 U11.2@4.775,-22.915
NetR45_1: R20.1 U7.62 | length 5.9
  Top Layer w0.2: U7.62@-38.445,-3.675 -38.395,-3.725 -38.395,-5.196 -38.275,-5.316 -38.275,-5.7 -36.125,-7.85 R20.1@-36.125,-8.575
NetR46_1: R21.1 U8.62 | length 5.9
  Top Layer w0.2: U8.62@-11.445,-3.675 -11.395,-3.725 -11.395,-4.827 -9.125,-7.097 R21.1@-9.125,-8.575
NetR47_1: R22.1 U9.62 | length 5.9
  Top Layer w0.2: U9.62@15.555,-3.675 15.605,-3.725 15.605,-4.827 17.875,-7.097 R22.1@17.875,-8.575
NetR48_1: R23.1 U10.62 | length 5.9
  Top Layer w0.2: U10.62@42.555,-3.675 42.605,-3.725 42.605,-4.827 44.875,-7.097 R23.1@44.875,-8.575
NetR62_1: R6.1 U3.10 | length 2.1
  Top Layer w0.2: R6.1@-7.45,25.975 -7.275,26.15 U3.10@-7.275,27.975
NetR63_1: R5.1 U2.10 | length 2.1
  Top Layer w0.2: R5.1@-43.2,26.05 -43.025,26.225 U2.10@-43.025,28.05
NetR64_1: R4.1 U1.10 | length 2.1
  Top Layer w0.2: R4.1@27.754,26.1 27.929,26.275 U1.10@27.929,28.1
NetR65_2: R3.2 U6.8 | length 11.5
  Top Layer w0.2: R3.2@-1.25,31.025 -1.25,33.775 0.4,35.425 3.993,35.425 5.125,34.293 U6.8@5.125,33.1
NetR66_2: R2.2 U5.8 | length 11.5
  Top Layer w0.2: R2.2@-37,31.1 -37,33.85 -35.35,35.5 -31.757,35.5 -30.625,34.368 U5.8@-30.625,33.175
NetR67_2: R1.2 U4.8 | length 11.5
  Top Layer w0.2: R1.2@33.954,31.15 33.954,33.9 35.604,35.55 39.197,35.55 40.329,34.418 U4.8@40.329,33.225
NetU7_9: U7.39 U16.9 | length 43
  Top Layer w0.2: U7.39@-46.795,2.675 -46.845,2.625 -49.309,2.625 -50.7,1.234 -50.7,-4.046 -54.417,-7.762 -54.515,-7.762 -56.3,-9.547 -56.3,-17.476 -50.576,-23.2 -46.176,-23.2 -45.45,-23.926 -45.45,-26.274 -45.7,-26.524 U16.9@-45.7,-27.75
NetU13_5: U7.5 Y1.1 | length 4.5
  Top Layer w0.2: U7.5@-35.595,0.175 -33.575,0.175 -32.825,-0.575 Y1.1@-31.375,-0.575
NetU13_6: U7.6 Y1.3 | length 4.4
  Top Layer w0.2: U7.6@-35.595,0.675 -33.725,0.675 -32.475,1.925 Y1.3@-31.675,1.925
NetU14_5: U8.5 Y2.1 | length 4.5
  Top Layer w0.2: U8.5@-8.595,0.175 -7.4,0.175 -6.65,-0.575 Y2.1@-4.375,-0.575
NetU14_6: U8.6 Y2.3 | length 4.4
  Top Layer w0.2: U8.6@-8.595,0.675 -7.25,0.675 -6,1.925 Y2.3@-4.675,1.925
NetU14_39: U2.9 U8.39 | length 44.7
  Top Layer w0.2: U2.9@-43.675,28.05 -43.675,26.975 -44.6,26.05 -44.6,23.9 -40.175,19.475 -30.541,19.475 -26.525,15.459 -26.525,11.885 -23.265,8.625 -22.15,8.625 v1(-22.1,8.675) ; v1(-22.175,2.325) -21.825,2.675 U8.39@-19.795,2.675
  Bottom Layer w0.2: v1(-22.175,2.325) -22.175,5.709 -22.601,6.135 -22.601,6.715 -22.6,6.716 -22.6,8.175 v1(-22.1,8.675)
NetU15_5: U9.5 Y3.1 | length 4.5
  Top Layer w0.2: U9.5@18.405,0.175 19.6,0.175 20.35,-0.575 Y3.1@22.625,-0.575
NetU15_6: U9.6 Y3.3 | length 4.4
  Top Layer w0.2: U9.6@18.405,0.675 19.75,0.675 21,1.925 Y3.3@22.325,1.925
NetU15_39: U3.9 U9.39 | length 35.4
  Top Layer w0.2: U3.9@-7.925,27.975 -7.925,26.9 -8.85,25.975 -8.85,23.825 1.2,13.775 1.2,11.125 3.7,8.625 4.85,8.625 v1(4.9,8.675) ; v1(4.825,2.325) 5.175,2.675 U9.39@7.205,2.675
  Bottom Layer w0.2: v1(4.825,2.325) 4.825,5.709 4.399,6.135 4.399,6.715 4.4,6.716 4.4,8.175 v1(4.9,8.675)
NetU16_5: U10.5 Y4.1 | length 4.5
  Top Layer w0.2: U10.5@45.405,0.175 46.6,0.175 47.35,-0.575 Y4.1@49.625,-0.575
NetU16_6: U10.6 Y4.3 | length 4.4
  Top Layer w0.2: U10.6@45.405,0.675 46.75,0.675 48,1.925 Y4.3@49.325,1.925
NetU16_39: U1.9 U10.39 | length 32.2
  Top Layer w0.2: U1.9@27.279,28.1 27.279,27.025 26.354,26.1 26.354,24.741 27.1,23.995 27.1,12.344 29.624,9.82 29.624,9.761 30.034,9.35 30.094,9.35 30.325,9.119 30.325,9.035 30.735,8.625 31.85,8.625 v1(31.9,8.675) ; v1(31.825,2.325) 32.175,2.675 U10.39@34.205,2.675
  Bottom Layer w0.2: v1(31.825,2.325) 31.825,5.709 31.399,6.135 31.399,6.715 31.4,6.716 31.4,8.175 v1(31.9,8.675)
"RS485; /RS232_External_iface1": P16.1 R38.2 U7.10 U15.13 | length 56.1
  Top Layer w0.2: U15.13@-56.15,-26.325 -56.15,-25.15 -56.3,-25 -56.3,-22.7 ; R38.2@-55.4,-22.75 -56.25,-22.75 -56.3,-22.7 ; v1(-52.5,5.6) -53,5.6 -54.2,4.4 -54.2,-2.047 -59,-6.847 -59,-17.3 -56.875,-19.425 P16.1@-56.875,-20.7 -56.3,-20.7 -56.3,-22.7 ; v1(-38.789,2.675) U7.10@-35.595,2.675
  Bottom Layer w0.2: v1(-52.5,5.6) -52.5,5.4 -52.3,5.2 -51.91,5.2 -51.5,4.79 -51.5,4.634 -49.566,2.7 -39.2,2.7 -38.975,2.475 -38.675,2.475 -38.789,2.589 v1(-38.789,2.675)
"RS485; /RS232_External_iface2": P2.1 R8.2 U5.13 U8.10 | length 53
  Top Layer w0.2: R8.2@-37.85,25.35 v1(-36.3,25.35) -36.3,21.85 P2.1@-36.075,21.625 ; P2.1@-36.4,21.625 -36.4,21 -35.775,20.375 -33.409,20.375 -33.384,20.35 -30.825,20.35 -29.875,21.3 -28.56,21.3 -24.101,16.841 v1(-24.101,15.826) ; v1(-33.775,24.475) -33.852,24.398 -33.852,24.202 -33.85,24.2 -33.225,24.825 U5.13@-33.225,26.625 ; v1(-12.675,2.35) -12.4,2.35 -12.275,2.475 -11.475,2.475 -11.275,2.675 U8.10@-8.595,2.675
  Bottom Layer w0.2: v1(-36.3,25.35) -35.15,24.2 -33.85,24.2 -33.852,24.202 -33.852,24.398 v1(-33.775,24.475) ; v1(-24.101,15.826) -22.85,14.575 -21.775,14.575 -21.65,14.45 -18.475,14.45 -18.475,8.654 -12.675,2.854 v1(-12.675,2.35)
"RS485; /RS232_External_iface3": P3.1 R9.2 U6.13 U9.10 | length 43.9
  Top Layer w0.2: R9.2@-2.1,25.275 v1(-0.55,25.275) -0.55,21.775 P3.1@-0.325,21.55 ; P3.1@-0.65,21.55 -0.26,21.55 2.899,18.391 v1(2.899,15.826) ; v1(1.975,24.4) 1.898,24.323 1.898,24.127 1.9,24.125 2.525,24.75 U6.13@2.525,26.55 ; v1(14.325,2.35) 14.6,2.35 14.725,2.475 15.525,2.475 15.725,2.675 U9.10@18.405,2.675
  Bottom Layer w0.2: v1(-0.55,25.275) 0.6,24.125 1.9,24.125 1.898,24.127 1.898,24.323 v1(1.975,24.4) ; v1(2.899,15.826) 4.15,14.575 5.225,14.575 5.35,14.45 8.525,14.45 8.525,8.654 14.325,2.854 v1(14.325,2.35)
"RS485; /RS232_External_iface4": P1.1 R7.2 U4.13 U10.10 | length 43.8
  Top Layer w0.2: R7.2@33.104,25.4 v1(34.654,25.4) 34.654,21.9 P1.1@34.879,21.675 ; P1.1@34.554,21.675 34.554,21.05 35.179,20.425 37.545,20.425 37.57,20.4 40.275,20.4 40.45,20.225 40.615,20.225 41.675,19.165 v1(41.675,15.575) ; v1(37.179,24.525) 37.102,24.448 37.102,24.252 37.104,24.25 37.729,24.875 U4.13@37.729,26.675 ; v1(41.325,2.35) 41.6,2.35 41.725,2.475 42.525,2.475 42.725,2.675 U10.10@45.405,2.675
  Bottom Layer w0.2: v1(34.654,25.4) 35.804,24.25 37.104,24.25 37.102,24.252 37.102,24.448 v1(37.179,24.525) ; v1(41.325,2.35) 41.325,2.854 38.875,5.304 38.875,9.747 42.2,13.072 42.2,14.984 41.675,15.509 v1(41.675,15.575)
RST_GEN_STM321: U7.15 U7.16 U8.15 U8.16 U9.15 U9.16 U10.15 U10.16 | length 149.9
  Top Layer w0.2: U7.15@-35.595,5.175 U7.16@-35.595,5.675 U7.16@-35.1,5.675 ; U7.15@-35.1,5.125 U7.16@-35.1,5.675 ; v1(-30.3,14.8) -31.025,14.075 -31.025,13.851 -35.075,9.801 -35.075,8.135 -35.1,8.11 U7.16@-35.1,5.675 ; v1(-23.466,19.266) -23.424,19.224 -23.224,19.224 -22.849,19.6 -19.678,19.6 -16.878,16.8 -9.1,16.8 v1(-7.8,18.1) -7.2,17.5 -7.2,5.65 ; U8.15@-8.595,5.175 -7.275,5.175 -7.2,5.25 -7.2,5.65 ; U8.16@-7.775,5.725 -7.825,5.675 U8.16@-8.595,5.675 -8.57,5.65 -7.2,5.65 ; v1(-4.5,21.3) -4.4,21.4 -3.3,21.4 -2.9,21 -2.9,19.769 -0.631,17.5 -0.334,17.5 0.162,17.004 0.7,17.004 0.704,17 v1(0.8,17) ; v1(7.3,18.1) v1(23.6,18.1) 24.3,17.4 24.3,14.3 19.8,9.8 19.8,5.65 ; U9.15@18.405,5.175 19.725,5.175 19.8,5.25 19.8,5.65 ; U9.16@19.225,5.725 19.175,5.675 U9.16@18.405,5.675 18.43,5.65 19.8,5.65 ; v1(28.3,18.1) 29,17.4 38.819,17.4 38.994,17.225 39.656,17.225 39.831,17.4 v1@40.8,17.4 ; v1(45.3,17.4) 45.3,17.8 ; U10.15@45.405,5.175 46.725,5.175 46.8,5.25 46.8,5.65 ; v1@45.5,17.5 45.5,8.1 46.8,6.8 46.8,5.65 ; U10.16@46.225,5.725 46.175,5.675 U10.16@45.405,5.675 45.43,5.65 46.8,5.65
  Bottom Layer w0.2: v1(-30.3,14.8) -30.2,14.7 -30.1,14.7 -25.534,19.266 v1(-23.466,19.266) ; v1(-7.8,18.1) -7.7,18.1 v1(-4.5,21.3) ; v1@0.7,17.004 0.704,17 v1(0.8,17) 5.334,17 6.434,18.1 v1(7.3,18.1) ; v1(23.6,18.1) v1(28.3,18.1) ; v1@40.634,17.8 40.834,17.6 43.61,17.6 43.91,17.9 44.49,17.9 44.79,17.6 45.1,17.6 v1(45.3,17.4)
  other v1: 40.8,17.7
RST_STM321: C25.2 S1.2 U7.7 | length 12.2
  Top Layer w0.2: U7.7@-35.595,1.175 -34.035,1.175 -32.872,2.338 -32.606,2.338 -31.875,3.069 -31.875,4.675 ; S1.2@-31.875,9.725 -31.875,4.675 ; C25.2@-30.875,4.675 -31.875,4.675
RST_STM322: C26.2 S3.2 U8.7 | length 12.3
  Top Layer w0.2: U8.7@-8.595,1.175 -7.316,1.175 -6.116,2.375 -6.06,2.375 -5.5,2.935 -5.5,5.035 -5.65,5.185 -5.65,6.225 -5.475,6.4 S3.2@-5.475,9.725 ; -5.45,4.675 C26.2@-3.875,4.675
RST_STM323: C27.2 S2.2 U9.7 | length 12.3
  Top Layer w0.2: U9.7@18.405,1.175 19.684,1.175 20.884,2.375 20.94,2.375 21.5,2.935 21.5,5.035 21.35,5.185 21.35,6.225 21.525,6.4 S2.2@21.525,9.725 ; 21.55,4.675 C27.2@23.125,4.675
RST_STM324: C28.2 S4.2 U10.7 | length 12.3
  Top Layer w0.2: U10.7@45.405,1.175 46.684,1.175 47.884,2.375 47.94,2.375 48.5,2.935 48.5,5.035 48.35,5.185 48.35,6.225 48.525,6.4 S4.2@48.525,9.725 ; 48.55,4.675 C28.2@50.125,4.675
"RX(TO STM)_External_iface1": U7.38 U15.10 | length 49.1
  Top Layer w0.2: U15.10@-57.45,-32.875 -57.45,-34.05 -56.8,-34.7 -55.5,-34.7 -53.5,-32.7 -53.5,-20.841 -56.7,-17.641 -56.7,-9.382 -54.68,-7.362 -54.582,-7.362 -51.2,-3.98 -51.2,1.3 -49.325,3.175 U7.38@-46.795,3.175
"RX(TO STM)_External_iface2": U5.10 U8.38 | length 41.2
  Top Layer w0.2: U5.10@-31.925,33.175 -32.075,33.025 -32.075,31.756 -34.625,29.206 -34.625,23.985 -34.14,23.5 -33.625,23.5 -31.975,21.85 v1(-31.7,21.85) ; v1(-28.675,19.525) -28.675,18.834 -24.4,14.559 -24.4,10.774 v1(-23.676,10.05) ; v1(-23.757,3.143) -23.75,3.15 -22.15,3.15 -22.125,3.175 U8.38@-19.795,3.175
  Bottom Layer w0.2: v1(-31.7,21.85) -31.525,21.675 -31.275,21.675 -29.125,19.525 v1(-28.675,19.525) ; v1(-23.757,3.143) -23.757,4.133 -23.551,4.339 -23.551,4.966 -23.575,4.99 -23.575,6.415 -23.682,6.522 -23.682,10.032 v1@-23.5,10.214 ; v1@-23.7,10.3 -23.7,10.051 v1(-23.676,10.05)
"RX(TO STM)_External_iface3": U6.10 U9.38 | length 42.7
  Top Layer w0.2: v1(-0.2,20) -0.2,19.49 1.6,17.69 1.6,15.569 3.353,13.816 v1(3.353,10.068) ; v1(3.243,3.143) 3.25,3.15 4.85,3.15 4.875,3.175 U9.38@7.205,3.175 ; U6.10@3.825,33.1 3.675,32.95 3.675,31.681 1.125,29.131 1.125,23.91 1.61,23.425 2.125,23.425 3.775,21.775 v1(4.05,21.775)
  Bottom Layer w0.2: v1(-0.2,20) 0.31,20 0.51,20.2 2.9,20.2 4.05,21.35 v1(4.05,21.775) 4.225,21.6 v1@4.325,21.6 ; v1(3.243,3.143) 3.243,4.133 3.449,4.339 3.449,4.966 3.425,4.99 3.425,6.415 3.318,6.522 3.318,10.032 v1@3.336,10.05 ; v1@3.3,10.3 3.3,10.051 v1@3.336,10.05 ; v1(3.353,10.068) v1@3.336,10.05 ; v1@3.5,10.214 v1@3.336,10.05
"RX(TO STM)_External_iface4": U4.10 U10.38 | length 45.2
  Top Layer w0.2: v1(30.243,3.143) 30.25,3.15 31.85,3.15 31.875,3.175 U10.38@34.205,3.175 ; v1(30.324,10.05) 30.324,14.174 v1(31.875,15.725) ; v1(32.225,18.825) 33.029,19.629 v1(39.254,19.629) ; U4.10@39.029,33.225 38.879,33.075 38.879,31.806 36.329,29.256 36.329,24.035 36.814,23.55 37.329,23.55 38.979,21.9 v1(39.254,21.9)
  Bottom Layer w0.2: v1(30.243,3.143) 30.243,4.133 30.449,4.339 30.449,4.966 30.425,4.99 30.425,6.415 30.318,6.522 30.318,10.032 v1@30.5,10.214 ; v1@30.3,10.3 30.3,10.051 v1(30.324,10.05) ; v1(31.875,15.725) 31.875,18.475 v1(32.225,18.825) ; v1(39.254,19.629) v1(39.254,21.9) 39.429,21.725 v1@39.529,21.725
RXD1: Q4.1 R59.1 U7.43 U19.7 | length 65.5
  Top Layer w0.2: U7.43@-46.795,0.675 -48.099,0.675 -49.825,-1.051 -49.825,-3.599 -49.8,-3.624 -49.8,-3.9 -49.4,-4.3 -48.893,-4.3 -48.3,-4.893 -48.3,-6.607 -48.968,-7.275 -49.73,-7.275 -50.4,-7.945 -50.4,-8.576 -51.8,-9.976 -51.8,-12.575 -51.95,-12.725 -51.95,-14.8 -51,-15.75 -51,-17.1 -48.7,-19.4 -34.3,-19.4 -30.4,-23.3 -30.4,-34.8 -29.2,-36 -27.825,-36 R59.1@-26.725,-34.9 -25.975,-34.9 -25.975,-34.4 -25.51,-33.935 U19.7@-24.275,-33.935
RXD2: Q6.1 R54.1 U8.43 U19.6 | length 45.6
  Top Layer w0.2: U19.6@-24.275,-32.665 -25.79,-32.665 -26.025,-32.9 R54.1@-26.725,-32.9 -27.625,-32 -29.1,-32 -29.9,-31.2 -29.9,-23.4 -26.3,-19.8 -26,-19.8 -24.7,-18.5 -24.7,-16.675 -25.325,-16.05 -25.325,-0.775 -23.875,0.675 U8.43@-19.795,0.675
RXD3: Q5.1 R36.1 U9.43 U11.7 | length 38.7
  Top Layer w0.2: U9.43@7.205,0.675 3.125,0.675 1.5,-0.95 1.5,-14.75 2.3,-15.55 2.3,-17.7 2.4,-17.8 4.926,-17.8 5.201,-18.075 9.065,-18.075 12.125,-21.135 R36.1@12.125,-21.95 11.375,-21.95 11.375,-22.45 10.91,-22.915 U11.7@9.675,-22.915
RXD4: Q7.1 R40.1 U10.43 U11.6 | length 48.9
  Top Layer w0.2: U11.6@9.675,-24.185 11.19,-24.185 11.425,-23.95 R40.1@12.125,-23.95 12.975,-24.8 14,-24.8 17.9,-20.9 28.8,-20.9 29,-20.7 v1(29,-21) ; v1(29.5,-19) 29.4,-19.1 29.4,-18.175 29.3,-18.075 29.3,-16.7 28.6,-16 28.6,-0.85 30.125,0.675 U10.43@34.205,0.675
  Bottom Layer w0.2: v1(29,-21) 29,-20.7 29.2,-20.5 29.2,-19.3 v1(29.5,-19)
SCK_EX_External_iface1: P29.3 U16.20 | length 4.6
  Top Layer w0.2: v1(-40.5,-36.7) U16.20@-40.5,-33.45
  Bottom Layer w0.2: P29.3@-40.8,-35.5 -40.5,-35.8 v1(-40.5,-36.7)
SCK_EX_External_iface2: P21.3 U2.20 | length 8.3
  Top Layer w0.2: v1@-48.925,35.225 -48.925,35.041 -48.875,34.991 U2.20@-48.875,33.75
  Bottom Layer w0.2: v1@-48.762,35.437 -48.025,34.7 P21.3@-42.25,34.7
  other v1: -48.8,35.4
SCK_EX_External_iface3: P23.3 U3.20 | length 8.3
  Top Layer w0.2: v1@-13.175,35.15 -13.175,34.966 -13.125,34.916 U3.20@-13.125,33.675
  Bottom Layer w0.2: v1@-13.012,35.362 -12.275,34.625 P23.3@-6.5,34.625
  other v1: -13.05,35.325
SCK_EX_External_iface4: P19.3 U1.20 | length 8.3
  Top Layer w0.2: v1@22.029,35.275 22.029,35.091 22.079,35.041 U1.20@22.079,33.8
  Bottom Layer w0.2: v1@22.192,35.487 22.929,34.75 P19.3@28.704,34.75
  other v1: 22.154,35.45
SCK_External_iface1: U7.34 U16.1 | length 48.5
  Top Layer w0.2: v1(-56.038,-6.262) -55.4,-5.624 -55.4,-4.944 -52.8,-2.344 -52.8,2.104 -52.204,2.7 -52.11,2.7 -51.496,3.314 -51.496,3.408 -49.729,5.175 U7.34@-46.795,5.175 ; v1@-53.5,-11 v1(-53.5,-11.2) -53.9,-11.6 -53.9,-16.4 -49.5,-20.8 -45.1,-20.8 -44.55,-21.35 -40.5,-25.4 U16.1@-40.5,-27.75
  Bottom Layer w0.2: v1(-56.038,-6.262) -56.038,-8.652 -53.49,-11.2 v1@-53.31,-11.2 ; v1(-53.5,-11.2) v1@-53.5,-11
SCK_External_iface2: U2.1 U8.34 | length 47.2
  Top Layer w0.2: U2.1@-48.875,28.05 -48.8,27.975 -48.8,25.163 -48.39,24.753 -47.963,24.753 -47.178,23.968 -47.178,23.084 -41.169,17.075 -31.535,17.075 -29.011,14.551 -29.011,10.461 -26.051,7.501 -26.051,6.076 -25.975,6 -25.251,5.276 v1(-25.251,4.825) -25.251,4.676 v1@-25.225,4.65 ; v1(-24.551,7.125) -24.401,6.975 -24.097,6.975 -22.472,5.35 -22.429,5.35 -22.254,5.175 U8.34@-19.795,5.175
  Bottom Layer w0.2: v1(-25.251,4.825) -25.05,5.026 -25.05,6.627 v1(-24.551,7.125)
SCK_External_iface3: U3.1 U9.34 | length 37.8
  Top Layer w0.2: U3.1@-13.125,27.975 -13.05,27.9 -13.05,25.088 -12.64,24.678 -12.306,24.678 -11.428,23.8 -11.428,23.009 -5.469,17.05 -5.469,16.719 -1.2,12.45 -1.2,10.05 0.949,7.901 0.949,6.076 1.025,6 1.749,5.276 v1(1.749,4.825) 1.749,4.676 v1@1.775,4.65 ; v1(2.449,7.125) 2.599,6.975 2.903,6.975 4.528,5.35 4.571,5.35 4.746,5.175 U9.34@7.205,5.175
  Bottom Layer w0.2: v1(1.749,4.825) 1.95,5.026 1.95,6.627 v1(2.449,7.125)
SCK_External_iface4: U1.1 U10.34 | length 34.6
  Top Layer w0.2: U1.1@22.079,28.1 22.154,28.025 22.154,25.213 22.564,24.803 22.898,24.803 24.7,23.001 24.7,11.29 27.925,8.065 27.925,6.1 28.025,6 28.749,5.276 v1(28.749,4.825) 28.749,4.676 v1@28.775,4.65 ; v1(29.449,7.125) 29.599,6.975 29.903,6.975 31.528,5.35 31.571,5.35 31.746,5.175 U10.34@34.205,5.175
  Bottom Layer w0.2: v1(28.749,4.825) 28.95,5.026 28.95,6.627 v1(29.449,7.125)
SWDCLK_STM321: P8.2 U7.49 | length 6
  Top Layer w0.2: U7.49@-44.945,-3.675 -44.945,-6.155 -45.7,-6.91 -45.7,-7.49 -45.29,-7.9 -44.64,-7.9 P8.2@-44.215,-8.325
SWDCLK_STM322: P9.2 U8.49 | length 5.2
  Top Layer w0.2: U8.49@-17.945,-3.675 -18.1,-3.83 -18.1,-6.39 -17.69,-6.8 -17.5,-6.8 -17.215,-7.085 P9.2@-17.215,-8.325
SWDCLK_STM323: P10.2 U9.49 | length 5.3
  Top Layer w0.2: U9.49@9.055,-3.675 9.055,-5.755 8.9,-5.91 8.9,-6.49 9.31,-6.9 9.6,-6.9 9.785,-7.085 P10.2@9.785,-8.325
SWDCLK_STM324: P11.2 U10.49 | length 5.1
  Top Layer w0.2: U10.49@36.055,-3.675 36.055,-5.755 36,-5.81 36,-6.39 36.41,-6.8 36.5,-6.8 36.785,-7.085 P11.2@36.785,-8.325
SWDIO_STM321: P8.4 U7.46 | length 11.2
  Top Layer w0.2: P8.4@-49.295,-8.325 -47.695,-6.725 -46.575,-6.725 -45.395,-5.545 -45.395,-2.589 -45.275,-2.468 -45.275,-1.615 -45.3,-1.59 -45.3,-1.1 -45.575,-0.825 U7.46@-46.795,-0.825
SWDIO_STM322: P9.4 U8.46 | length 11.2
  Top Layer w0.2: P9.4@-22.295,-8.325 -20.695,-6.725 -20.365,-6.725 -20.29,-6.8 -19.65,-6.8 -18.5,-5.65 -18.5,-2.693 -18.275,-2.468 -18.275,-1.125 -18.575,-0.825 U8.46@-19.795,-0.825
SWDIO_STM323: P10.4 U9.46 | length 11.2
  Top Layer w0.2: P10.4@4.705,-8.325 6.13,-6.9 7.25,-6.9 8.605,-5.545 8.605,-2.589 8.725,-2.468 8.725,-1.125 8.425,-0.825 U9.46@7.205,-0.825
SWDIO_STM324: P11.4 U10.46 | length 11.3
  Top Layer w0.2: P11.4@31.705,-8.325 33.305,-6.725 33.835,-6.725 33.91,-6.8 34.49,-6.8 34.9,-6.39 34.9,-6.25 35.605,-5.545 35.605,-2.589 35.725,-2.468 35.725,-1.125 35.425,-0.825 U10.46@34.205,-0.825
SYNC_EX_External_iface1: J5.9 U16.12 | length 24.6
  Top Layer w0.2: U16.12@-45.7,-33.45 -45.6,-33.55 -45.6,-38.49 -45.7,-38.59 -45.7,-41.977 -42.877,-44.8 -34.8,-44.8 J5.9@-32.008,-42.007
SYNC_EX_External_iface2: J2.9 U2.12 | length 10.6
  Top Layer w0.2: U2.12@-43.675,33.75 -43.675,36.928 -42.9,37.703 -42.9,39.4 -40.28,42.02 J2.9@-39.405,42.02
SYNC_EX_External_iface3: J3.9 U3.12 | length 11.3
  Top Layer w0.2: U3.12@-7.925,33.75 -7.9,33.775 -7.9,39.9 -5.78,42.02 J3.9@-3.655,42.02
SYNC_EX_External_iface4: J1.9 U1.12 | length 10.6
  Top Layer w0.2: U1.12@27.279,33.875 27.279,38.779 30.645,42.145 J1.9@31.549,42.145
"TX(FROM STM)_External_iface1": U7.37 U15.20 | length 49.5
  Top Layer w0.2: U15.20@-60.7,-26.325 -60.7,-28 -61.6,-28.9 -63.9,-28.9 -64.5,-28.3 -64.5,-12.8 v1(-60.7,-9) ; v1@-57.104,-8.796 -57.104,-8.304 -55.762,-6.962 -54.748,-6.962 -51.6,-3.814 -51.6,1.513 -50.296,2.817 -50.296,2.911 -49.532,3.675 U7.37@-46.795,3.675
  Bottom Layer w0.2: v1(-60.7,-9) -57.7,-9 v1(-57.3,-8.6)
"TX(FROM STM)_External_iface2": U5.20 U8.37 | length 29
  Top Layer w0.2: v1(-28.925,24.475) -28.675,24.725 U5.20@-28.675,26.625 ; v1(-28.85,20.6) -28.76,20.6 -27.975,19.815 -27.975,19.235 -27.975,18.7 -24,14.725 -24,11.364 -22.975,10.339 v1(-22.975,9.325) ; v1(-23.05,3.85) -22.875,3.675 U8.37@-19.795,3.675
  Bottom Layer w0.2: v1@-28.925,20.45 v1@-28.925,20.525 ; v1(-28.925,24.475) v1@-28.925,20.525 ; v1(-28.85,20.6) v1@-28.925,20.525 ; v1(-23.05,3.85) -23.05,9.25 v1(-22.975,9.325)
"TX(FROM STM)_External_iface3": U6.20 U9.37 | length 31.8
  Top Layer w0.2: v1(0.8,19.5) 1.1,19.5 2,18.6 2,15.735 4.125,13.61 4.125,9.425 v1(4.025,9.325) ; v1(3.95,3.85) 4.125,3.675 U9.37@7.205,3.675 ; v1(6.825,24.4) 7.075,24.65 U6.20@7.075,26.55
  Bottom Layer w0.2: v1(3.95,3.85) 3.95,9.25 v1(4.025,9.325) ; v1(6.825,24.4) 6.825,23.525 2.8,19.5 v1(0.8,19.5) ; v1(0.8,19.5) 0.8,19.3 v1(0.8,19.5)
"TX(FROM STM)_External_iface4": U4.20 U10.37 | length 34.1
  Top Layer w0.2: v1(30.95,3.85) 31.125,3.675 U10.37@34.205,3.675 ; v1(31.025,9.325) 31.025,13.45 v1(32.95,15.375) ; v1(34.1,18.825) 39.625,18.825 v1(40.325,19.525) ; v1(42.029,24.525) 42.279,24.775 U4.20@42.279,26.675
  Bottom Layer w0.2: v1(30.95,3.85) 30.95,9.25 v1(31.025,9.325) ; v1(32.95,15.375) 33.875,16.3 33.875,18.6 v1(34.1,18.825) ; v1(40.325,19.525) 40.325,21.415 42.029,23.119 v1(42.029,24.525)
TXD1: Q8.1 R45.1 U7.42 | length 52.2
  Top Layer w0.2: U7.42@-46.795,1.175 -48.165,1.175 -50.3,-0.96 -50.3,-3.966 -49.466,-4.8 -49.1,-4.8 -48.7,-5.2 -48.7,-6.3 -49.275,-6.875 -49.896,-6.875 -50.9,-7.879 -50.9,-8.5 -52.55,-10.15 -52.55,-15.35 -51.95,-15.95 -51.95,-16.425 -51.95,-17.15 -49.3,-19.8 -34.7,-19.8 -31.2,-23.3 v1(-31.2,-24.6) ; v1(-28.8,-24.7) -27.7,-24.7 R45.1@-27.45,-24.95
  Bottom Layer w0.2: v1(-31.2,-24.6) -28.9,-24.6 v1(-28.8,-24.7)
TXD2: Q10.1 R51.1 U8.42 | length 37.5
  Top Layer w0.2: v1(-28.8,-21.175) -25.325,-17.7 -25.325,-16.95 -25.925,-16.35 -25.925,-0.45 -24.3,1.175 U8.42@-19.795,1.175 ; v1(-27.8,-22.3) -29.5,-24 -29.5,-26.1 -28.95,-26.65 R51.1@-27.45,-26.65
  Bottom Layer w0.2: v1(-28.8,-21.175) -28.8,-21.3 v1(-27.8,-22.3)
TXD3: Q9.1 R46.1 U9.42 | length 86.7
  Top Layer w0.2: U9.42@7.205,1.175 2.7,1.175 1.075,-0.45 1.075,-16.35 1.675,-16.95 1.675,-17.7 2.175,-18.2 4.76,-18.2 5.035,-18.475 8.075,-18.475 v1(9.7,-20.1) ; v1(12.2,-20.1) 12.5,-19.8 28.744,-19.8 29.044,-20.1 29.956,-20.1 30.256,-19.8 37.23,-19.8 39.664,-19.8 39.964,-19.5 42.036,-19.5 42.336,-19.8 54.5,-19.8 55.9,-21.2 55.9,-24.8 55.3,-25.4 R46.1@53.75,-25.4
  Bottom Layer w0.2: v1(9.7,-20.1) v1(12.2,-20.1)
TXD4: Q11.1 R39.1 U10.42 | length 58.6
  Top Layer w0.2: U10.42@34.205,1.175 29.7,1.175 28.075,-0.45 28.075,-16.35 28.675,-16.95 28.675,-17.7 28.675,-18.425 28.8,-18.55 28.8,-19.29 29.21,-19.7 29.79,-19.7 30.19,-19.3 39.599,-19.3 39.799,-19.1 42.201,-19.1 42.401,-19.3 55.3,-19.3 v1(55.6,-19.6) ; R39.1@53.75,-23.7 54.4,-23.7 54.7,-23.4 v1(54.7,-21)
  Bottom Layer w0.2: v1(54.7,-21) 55.6,-20.1 v1(55.6,-19.6)
UGND: C50.1 C55.1 C56.1 C57.1 C60.1 C61.1 C65.1 C66.1 C67.1 C68.1 C69.1 C70.1 C71.1 C72.1 C73.1 C74.2 C75.2 C76.1 C77.1 C78.1 C79.1 J4.4 R66.1 U12.5 U13.5 U14.1 U18.2 U18.3 U20.1 U20.5 U20.10 U20.11 U20.13 U20.15 U20.25 U20.35 U20.47 U20.51 U22.5 | length 73.1
  Top Layer w0.2: v1(-18.925,-42.7) -18.9,-42.725 U22.5@-18.9,-43.595 ; v1(-16.15,-28.875) U13.5@-16.15,-27.555 -14.195,-27.555 C56.1@-13.7,-28.05 ; C70.1@-9.2,-41.1 -8.825,-41.1 -8.025,-41.9 -7.9,-41.9 ; C66.1@-9.2,-35.6 -8.475,-35.6 -8.175,-35.9 ; v1(-8.3,-34.7) -8.175,-34.825 -8.175,-35.9 ; v1(-7,-43.5) -7.4,-43.5 -8.3,-42.6 -8.3,-42.3 -7.9,-41.9 ; U20.47@-6.5,-41.9 -7.9,-41.9 ; U20.35@-6.5,-35.9 -8.175,-35.9 ; C77.1@-6.45,-46.85 -6.45,-45.75 v1(-6.4,-45.7) ; U20.51@-3.65,-44.25 -3.65,-45.8 v1(-3.575,-45.875) -2.95,-46.5 C79.1@-2.95,-46.85 ; C61.1@-2.95,-30.85 v1(-1.75,-30.85) C60.1@-0.45,-30.85 -0.45,-31.275 -1.15,-31.975 U20.25@-1.15,-33.05 ; U20.11@4.65,-37.35 U20.11@4.7,-37.4 6.525,-37.4 6.55,-37.425 ; U20.10@4.7,-37.9 6.075,-37.9 6.55,-37.425 ; U20.13@4.7,-36.4 3.664,-36.4 3.35,-36.086 3.35,-35.714 3.614,-35.45 4.65,-35.45 U20.15@4.7,-35.4 5.85,-35.4 6.225,-35.025 v1(6.225,-34.15) ; C78.1@5.05,-46.85 R66.1@7.05,-46.85 ; v1@5.05,-44.575 v1(5.025,-44.55) 4.7,-44.225 U20.1@4.7,-42.4 4.65,-42.35 3.614,-42.35 3.35,-42.086 3.35,-40.714 3.614,-40.45 4.65,-40.45 U20.5@4.7,-40.4 6.375,-40.4 6.625,-40.15 C72.1@7.55,-40.15 C71.1@9.35,-40.15 C73.1@11.15,-40.15 ; C74.2@8.975,-45.4 9.85,-45.4 v1(10.075,-45.625) ; C65.1@9.05,-35.35 9.05,-36.65 C67.1@9.35,-36.95 ; v1(11.125,-36) 11.15,-36.025 C69.1@11.15,-36.95 C67.1@9.35,-36.95 ; C75.2@18.05,-47.025 18.075,-47.05 v1(19.1,-47.05) ; U14.1@26.675,-30.75 28.35,-30.75 ; v1(27.6,-27.3) 27.7,-27.4 C55.1@29.075,-27.4 ; v1(28.5,-32.15) 28.35,-32 28.35,-30.75 ; C57.1@29.075,-30.65 28.975,-30.75 28.35,-30.75 ; C50.1@40,-22.3 40.495,-22.795 40.8,-22.795 ; v1(41,-22) 40.8,-22.2 40.8,-22.795 ; U12.5@42.2,-22.545 U12.5@42.45,-22.795 40.8,-22.795 ; U18.3@45.575,-45.415 U18.2@45.575,-46.685 47.665,-46.685 C76.1@48.1,-46.25 49.35,-46.25 v1(49.4,-46.2) ; 6.55,-37.425 7.025,-36.95 C68.1@7.55,-36.95 C67.1@9.35,-36.95
  Bottom Layer w0.2: v1(-1.75,-30.85) v1@-1.675,-30.85
  other v1: 5.95,-46.975
USB_N: J4.2 U20.7 | length 29.5
  Top Layer w0.2: v1(2.275,-38.102) 2.896,-38.723 2.896,-38.774 3.522,-39.4 U20.7@4.7,-39.4
  Bottom Layer w0.2: v1(2.275,-38.102) 2.35,-38.027 2.35,-37.75 2.175,-37.575 2,-37.575 1.7,-37.875 1.7,-38.5 2.196,-38.996 18.004,-38.996 19.754,-37.246 24.5,-37.246 25,-36.746 J4.2@25,-36.5
USB_P: J4.3 U20.8 | length 31.1
  Top Layer w0.2: v1(2.914,-37.247) 3.35,-37.684 3.35,-38.586 3.664,-38.9 U20.8@4.7,-38.9
  Bottom Layer w0.2: v1(2.914,-37.247) 2.732,-37.429 2.671,-37.429 2.363,-37.121 1.812,-37.121 1.246,-37.687 1.246,-38.688 2.008,-39.45 18.192,-39.45 19.942,-37.7 24.5,-37.7 J4.3@25,-38.2
VBUS: C55.2 C76.2 J4.1 U14.3 U18.1 | length 43.1
  Top Layer w0.2: U14.3@26.675,-26.15 28.825,-26.15 C55.2@29.075,-25.9 30.125,-25.9 30.7,-26.475 30.7,-33.025 27.5,-36.225 J4.1@27.5,-36.5 29.5,-38.5 29.5,-41.8 31.4,-43.7 38.3,-43.7 42.555,-47.955 U18.1@45.575,-47.955 47.895,-47.955 C76.2@48.1,-47.75
VCC5: C58.2 C63.2 Q1.3 Q2.3 Q3.3 Q12.3 R10.2 R12.2 R14.2 R55.2 U18.13 U21.3 | length 409.1
  Top Layer w0.2: -57,31.091 -55.834,29.925 -55.525,29.925 -53.045,27.445 Q2.3@-53.045,26.525 ; Q2.3@-53.045,26.146 Q2.3@-53.045,26.525 ; R12.2@-52.885,24.075 -52.885,26.365 Q2.3@-53.045,26.525 ; Q12.3@-35.32,-31.004 Q12.3@-35.32,-30.625 -35.16,-30.785 R55.2@-35.16,-33.075 ; Q1.3@-18.52,26.371 Q1.3@-18.52,26.75 ; R10.2@-18.36,24.3 -18.36,26.59 Q1.3@-18.52,26.75 ; -16,47.3 -16,40.5 -22.2,34.3 -22.2,29.8 -21.3,28.9 -19.4,28.9 -18.52,28.02 Q1.3@-18.52,26.75 ; Q3.3@17.73,26.121 Q3.3@17.73,26.5 ; R14.2@17.89,24.05 17.89,26.34 Q3.3@17.73,26.5 ; 18.1,47.3 18.1,40.2 14.2,36.3 14.2,29.8 15.3,28.7 16.9,28.7 17.7,27.9 17.7,26.53 Q3.3@17.73,26.5 ; U18.13@45.575,-32.715 48.135,-32.715 C63.2@48.2,-32.65 U21.3@51,-32.65 ; U21.3@51.15,-32.8 U21.3@51,-32.65 ; v1(55.8,-26.6) 53,-26.6 50.8,-28.8 C58.2@50.8,-30.15 50.8,-32.45 U21.3@51,-32.65 ; v1(56.8,-13.8) 58.3,-15.3 58.3,-24.99 58.2,-25.09 v1(58.2,-26.4)
  Top Layer w0.5: v1(-61.5,-6.5) -65.3,-10.3 -65.3,-38.5 -56.4,-47.4 -33.3,-47.4 -28.4,-42.5 -28.4,-39 -32.9,-34.5 -33.735,-34.5 R55.2@-35.16,-33.075 ; v1(-56.1,5.9) -57,6.8 -57,31.091 -57,33.6 -53.25,37.35 -46.25,37.35 -44.65,38.95 -44.65,40.793 -43.8,41.643 -43.8,42.7 -39.2,47.3 -16,47.3 18.1,47.3 43,47.3 43,42.2 54.8,30.4 54.8,-4.8 v1(57.8,-7.8)
  Bottom Layer w0.2: v1(55.8,-26.6) 56,-26.4 v1(58.2,-26.4)
  Bottom Layer w0.5: v1(-61.5,-6.5) -59,-6.5 -54.6,-2.1 -54.6,4.4 v1(-56.1,5.9) ; v1(56.8,-13.8) 56.8,-8.8 v1(57.8,-7.8)
pads on no net: D1.1 D2.1 D3.1 D16.1 J1.10 J1.11 J2.10 J2.11 J3.10 J3.11 J4.5 J5.10 J5.11 U1.8 U1.13 U2.8 U2.13 U3.8 U3.13 U4.9 U5.9 U6.9 U7.2 U7.3 U7.4 U7.17 U7.20 U7.21 U7.24 U7.25 U7.26 U7.29 U7.30 U7.33 U7.40 U7.41 U7.44 U7.45 U7.50 U7.51 U7.52 U7.53 U7.55 U7.56 U7.61 U8.2 U8.3 U8.4 U8.17 U8.20 U8.21 U8.24 U8.25 U8.26 U8.29 U8.30 U8.33 U8.40 U8.41 U8.44 U8.45 U8.50 U8.51 U8.52 U8.53 U8.55 U8.56 U8.61 U9.2 U9.3 U9.4 U9.17 U9.20 U9.21 U9.24 U9.25 U9.26 U9.29 U9.30 U9.33 U9.40 U9.41 U9.44 U9.45 U9.50 U9.51 U9.52 U9.53 U9.55 U9.56 U9.61 U10.2 U10.3 U10.4 U10.17 U10.20 U10.21 U10.24 U10.25 U10.26 U10.29 U10.30 U10.33 U10.40 U10.41 U10.44 U10.45 U10.50 U10.51 U10.52 U10.53 U10.55 U10.56 U10.61 U15.9 U16.8 U16.13 U18.14 U18.15 U18.16 U18.17 U18.26 U18.27 U18.28 U20.18 U20.19 U20.21 U20.22 U20.23 U20.24 U20.28 U20.29 U20.30 U20.32 U20.33 U20.34 U20.36 U20.40 U20.41 U20.43 U20.44 U20.45 U20.46 U20.53 U20.54 U20.55 U20.57 U20.58 U20.59 U20.60 U22.6 U22.7 Y5.1 Y5.3

## Polygon pours and split planes (outlines as drawn)
GND_STM321 on Bottom Layer "main_gnd" (hatched 90Degree grid 0.508 track 0.203, pour order 4): -66,-49.75 -66,-4.2 -60,-4.2 ccw(c-60,0) -60,4.2 -66,4.2 -66,49.75 65.9,49.75 66,48.8 66,4.2 60,4.2 60.007,4.208 ccw(c60.007,0.008) 60.007,-4.192 60,-4.2 66,-4.2 66,-5 66,-49.75
UGND on Bottom Layer "UGND" (hatched 90Degree grid 0.508 track 0.203, pour order 3): -20.6,-30.6 -19.5,-29.5 -18,-29.5 -18,-29.2 -17.5,-28.7 -17.5,-23.3 -17.5,-23.2 -17.2,-22.9 -15.4,-21.1 6,-21.1 6,-21.2 6.3,-21.5 6.3,-26.6 6.3,-26.7 7.9,-28.3 8.2,-28.6 17.5,-28.6 17.5,-27.5 21.2,-23.8 21.5,-24.1 34.1,-24.1 34.7,-24.1 37.2,-21.6 43.5,-21.6 43.6,-21.6 43.9,-21.9 43.9,-27.2 43.8,-27.2 42.3,-28.7 42.1,-28.9 34.9,-28.9 34.8,-28.9 33.3,-30.4 32.9,-30.8 32.9,-36.3 32.9,-36.9 34.4,-38.4 39.3,-43.3 47.1,-43.3 48.4,-43.3 50.1,-45 50.1,-49.4 -20.6,-49.4